# Altium PCB auto.PcbDoc
Units mil, origin at the board's own origin, x right, y up, seen from the top; angles counter-clockwise.
Board outline 5000 x 3000 mil, 2 copper layers (Top Layer, Bottom Layer); 35 components, 42 nets, 179 pads, 26 vias.
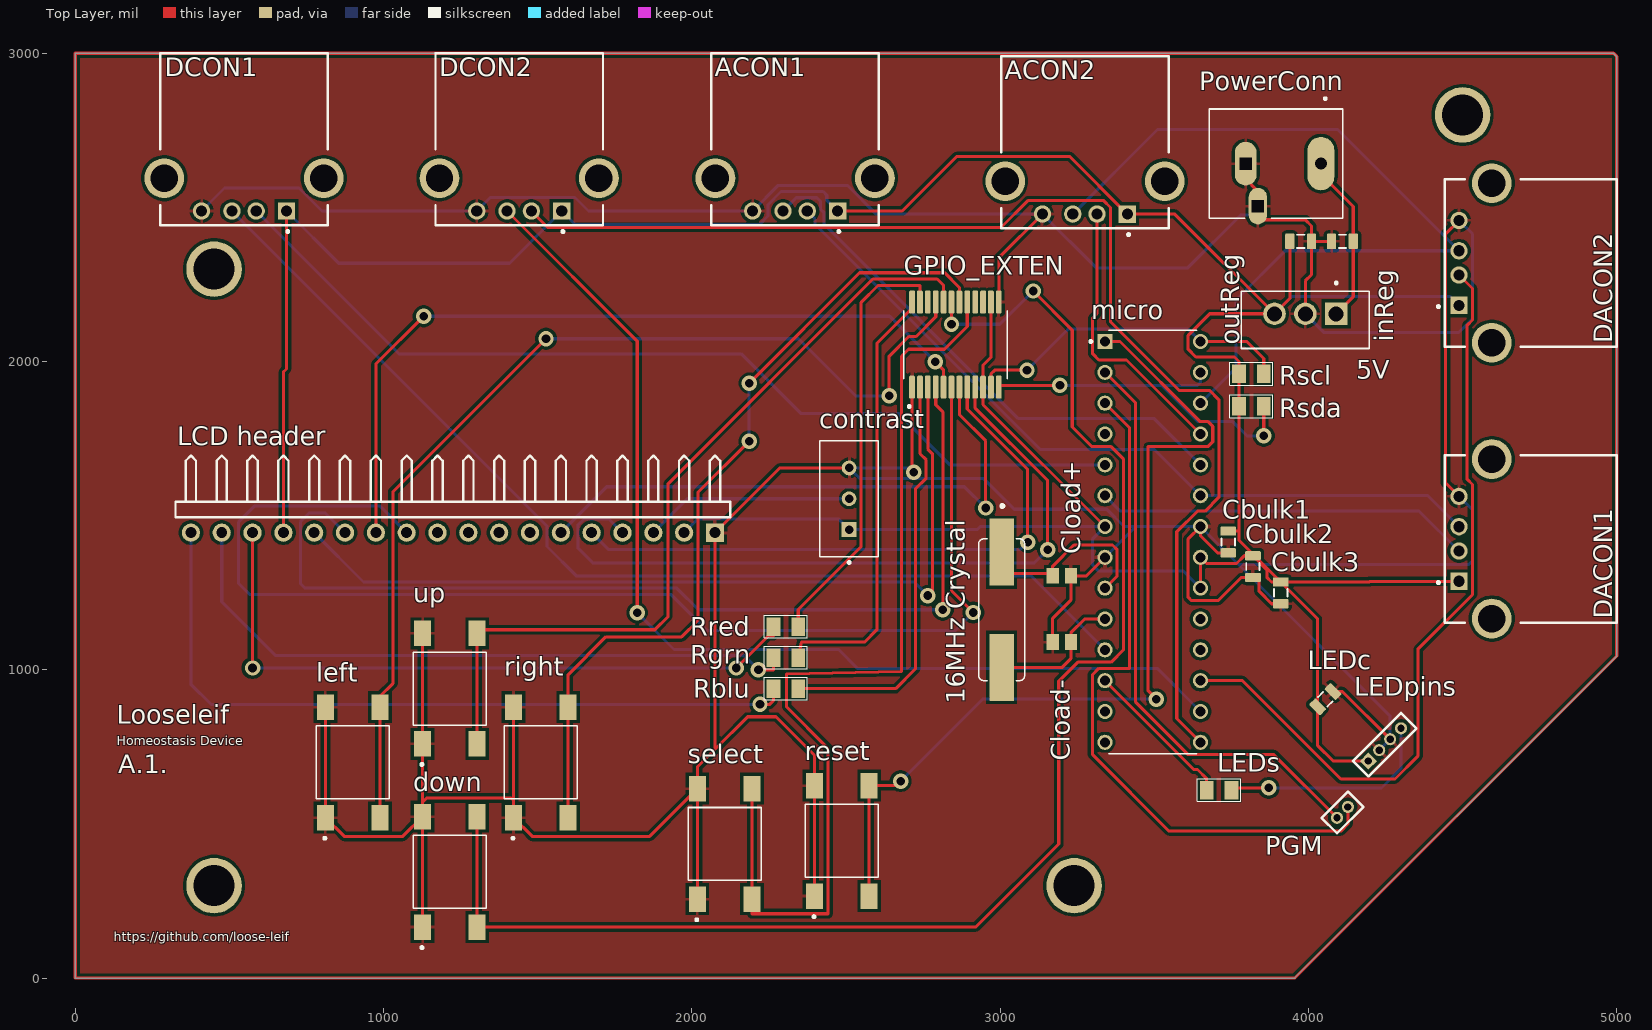
[diagram p0: Top Layer view]
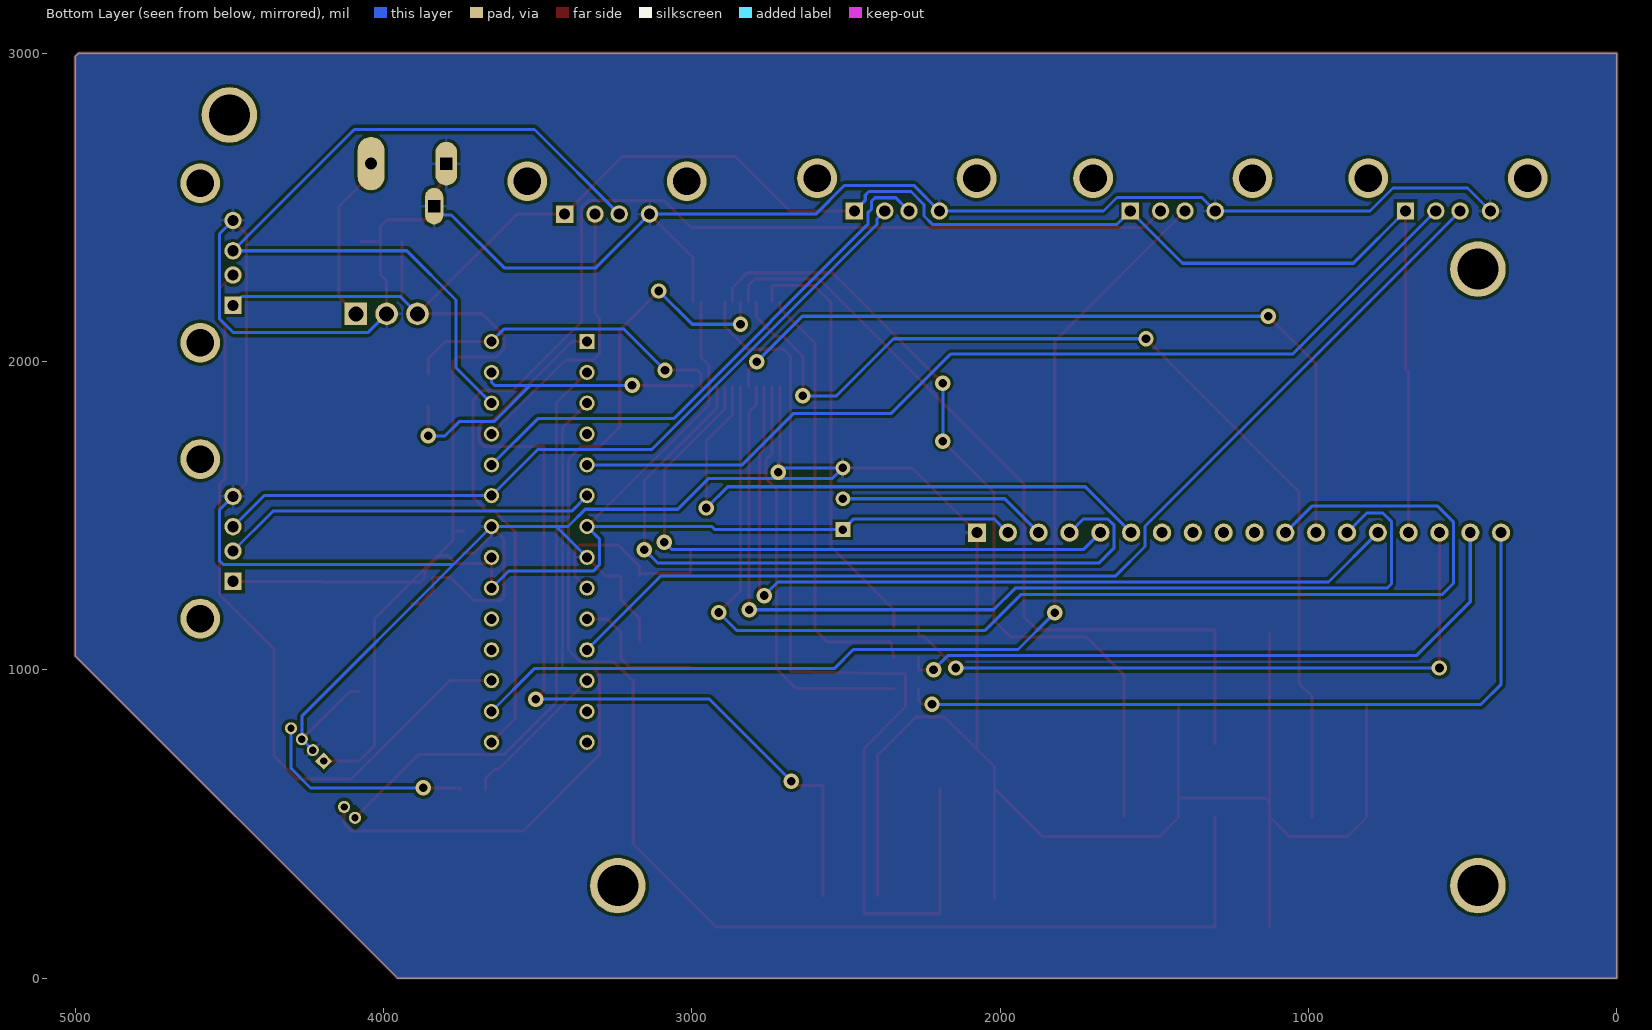
[diagram p1: Bottom Layer view, seen from below]
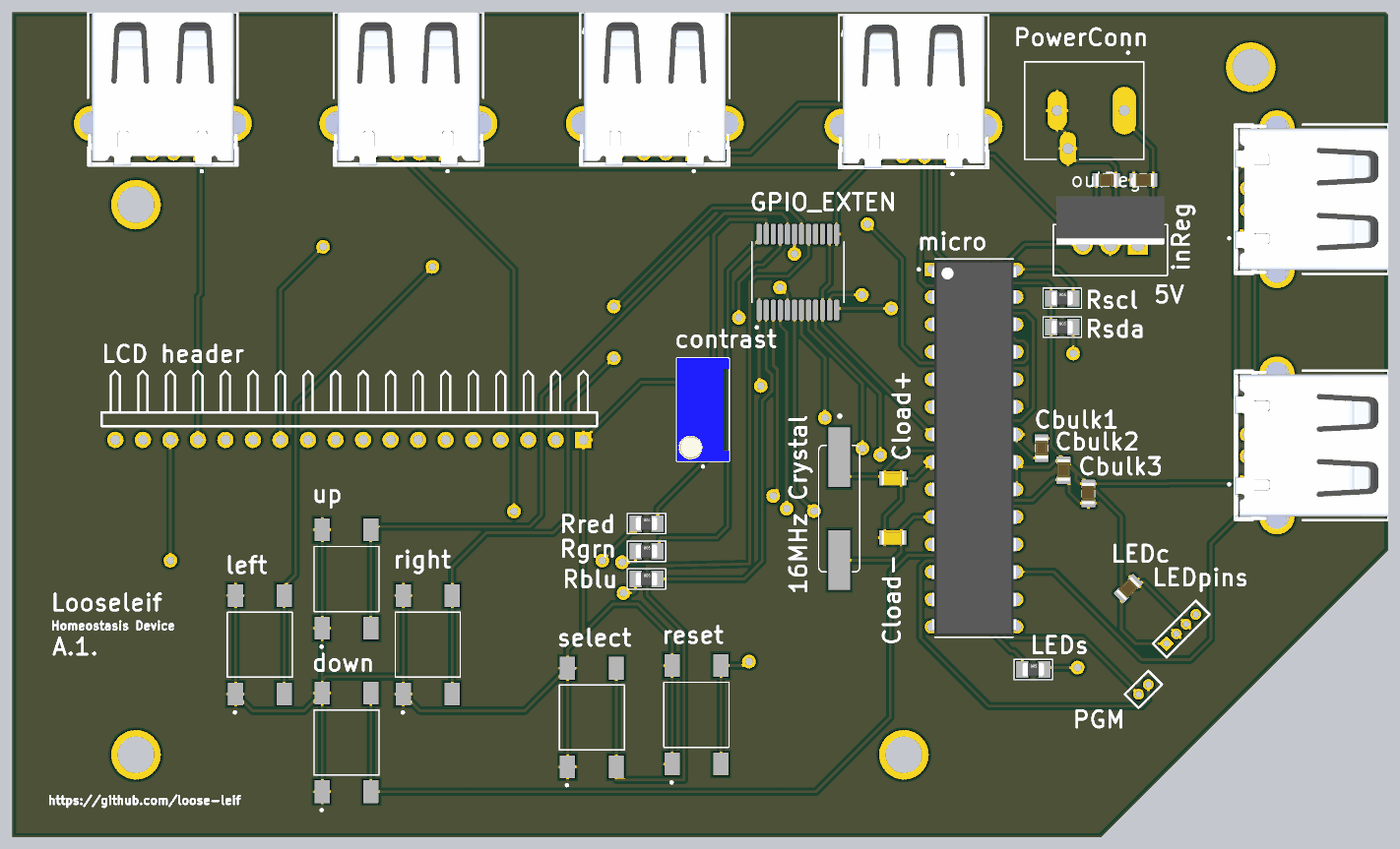
[diagram p2: 3D render of the assembled board from above, using the file's embedded part models]

## Layer stack, top to bottom
Top Solder: solder mask 0.4, Solder Resist, Dk 3.5
Top Layer: signal copper 1.4
Dielectric 1: dielectric 12.6, FR-4, Dk 4.8
Bottom Layer: signal copper 1.4
Bottom Solder: solder mask 0.4, Solder Resist, Dk 3.5

## Board outline
0,0 3955,0 5000,1045 5000,2990 4990,3000 0,3000

## Design rules (kind name [scope] priority, off if disabled: settings)
Clearance [All] p1: gap=10 ignorepadtopadclearanceinfootprint=FALSE except(0: Arc-Hole Track-Hole SMDPad-Hole THPad-Hole Via-Hole Fill-Hole Poly-Hole Region-Hole Text-Hole)
PolygonConnect [All] p1: connectstyle=Relief reliefconductorwidth=10 reliefentries=4 polygonreliefangle="90 Angle" airgapwidth=10
RoutingVias [All] p1: holewidth=28 width=50 viastyle="Through Hole" minholewidth=28 minwidth=50 maxholewidth=28 maxwidth=50
SolderMaskExpansion [All] p1: expansion=4 istentingtop=FALSE
Width [All] p1: maxlimit=10 minlimit=10 preferedwidth=10
30 further rules are at their usual default settings.

## Components (designator, comment, footprint, x,y, rotation, side; value= is the part's Value field where it differs from the comment)
5V "LM78M05CT" TO254P1054X470X1955-3 3990,2155 r180 top
"16MHz Crystal" "FC4SDCBMM16.0-T1" XTAL_FOXSDLF/160-20 3005,1195 r270 top
ACON1 "USB1130-15-A_REVA" GCT_USB1130-15-A_REVA 2335,2595 r180 top
ACON2 "USB1130-15-A_REVA" GCT_USB1130-15-A_REVA 3275,2585 r180 top
Cbulk1 "Capacitor 4.7µF +/-40% 25V 0805" CAPC0805(2012)145_L 3740,1415 r90 top value=100nF
Cbulk2 "Capacitor 4.7µF +/-40% 25V 0805" CAPC0805(2012)145_L 3820,1335 r90 top value=100nF
Cbulk3 "Capacitor 4.7µF +/-40% 25V 0805" CAPC0805(2012)145_L 3910,1250 r90 top value=100nF
Cload+ "Capacitor 1 uF +/- 10% 50 V 0805" CAPC2013X135X45ML10T25 3200,1305 r180 top value=20pF
Cload- "Capacitor 1 uF +/- 10% 50 V 0805" CAPC2013X135X45ML10T25 3200,1090 r0 top value=20pF
contrast "3296W-1-254LF" TRIM_3296W-1-254LF 2510,1555 r90 top
DACON1 "USB1130-15-A_REVA" GCT_USB1130-15-A_REVA 4595,1425 r90 top
DACON2 "USB1130-15-A_REVA" GCT_USB1130-15-A_REVA 4595,2320 r90 top
DCON1 "USB1130-15-A_REVA" GCT_USB1130-15-A_REVA 547.37,2595 r180 top
DCON2 "USB1130-15-A_REVA" GCT_USB1130-15-A_REVA 1440,2595 r180 top
down "4-1437565-2" SW_4-1437565-2 1215,345 r90 top
GPIO_EXTEN "MCP23018-E/SS" SOP65P780X200-24N 2855,2055 r90 top
inReg "Capacitor 4.7µF +/-40% 25V 0805" CAPC0805(2012)145_L 4110.04,2390 r180 top value=330nF
"LCD header" "Header 18H" HDR1X18H 2075,1445 r180 top
LEDc "Capacitor 4.7µF +/-40% 25V 0805" CAPC0805(2012)145_L 4055,905 r45 top value=100nF
LEDpins "MHDR1X4" MHDR1X4 4194.29,704.29 r45 top
LEDs "R_0805_4.7K_1%" 0805_Resistor 3710,610 r0 top value=220
left "4-1437565-2" SW_4-1437565-2 900,700 r90 top
micro "ATMEGA328-PU" DIP787W46P254L3467H508Q28 3495,1415 r0 top
outReg "Capacitor 4.7µF +/-40% 25V 0805" CAPC0805(2012)145_L 3975,2390 r0 top value=100nF
PGM "MHDR1X2" MHDR1X2 4092.64,520 r45 top
PowerConn "PJ-044BH" CUI_PJ-044BH 3895,2642.14 r270 top
Rblu "R_0805_200_1%" 0805_Resistor 2305,939.44 r0 top value=200
reset "4-1437565-2" SW_4-1437565-2 2486.42,445.47 r90 top
Rgrn "R_0805_200_1%" 0805_Resistor 2305,1040 r0 top value=200
right "4-1437565-2" SW_4-1437565-2 1510,700 r90 top
Rred "R_0805_200_1%" 0805_Resistor 2305,1140.56 r0 top value=200
Rscl "R_0805_4.7K_1%" 0805_Resistor 3815,1960 r0 top value=4.7K
Rsda "R_0805_4.7K_1%" 0805_Resistor 3815,1855 r0 top value=4.7K
select "4-1437565-2" SW_4-1437565-2 2106.42,435.47 r90 top
up "4-1437565-2" SW_4-1437565-2 1215,939.13 r90 top

## Footprints (in the part's own frame and the unit in brackets; to place one, negate y for a bottom-side part, rotate by r counter-clockwise, add the part's x,y. Pads: shape width x height; smd on the part's side, far side on the other; paste and mask are expansions set on the pad)
0805_Resistor [mil] "0805 Resistor"
  rect 45x60 smd: 1(-40,0) 2(40,0)
  silkscreen extent -70,-37 70,37, body extent -39,-25 39,25, height 31
CAPC0805(2012)145_L [mm] "Chip Capacitor, Body 2.0x1.2mm, Height 1.45mm, IPC High Density"
  rrect25% 0.76x1.3 smd: 1(-0.9,0) 2(0.89,0)
  silkscreen extent -0.3,-0.55 0.3,0.55, body extent -1,-0.6 1,0.6, height 1.45
CAPC2013X135X45ML10T25 [mm] "Chip Capacitor, 2-Leads, Body 2.10x1.35mm, IPC Low Density"
  rect 1x1.3 smd: 1(-0.75,0) 2(0.75,0)
  body extent -1.05,-0.67 1.05,0.67, height 1.35
CUI_PJ-044BH [mm]
  oval 4.4x2.2 hole 1: 1(0,3.7)
  oval 3.6x1.8 hole 1 square: 2(0,-2.5)
  oval 3.016x1.508 hole 1 square: 3(3.5,-1.5)
  silkscreen extent -5.45,-5.5 4.5,5.5
DIP787W46P254L3467H508Q28 [mm]
  rect 1.25x1.25 hole 0.83: 1(-3.937,16.51)
  round 1.25 hole 0.83: 2(-3.937,13.97) 3(-3.937,11.43) 4(-3.937,8.89) 5(-3.937,6.35) 6(-3.937,3.81) 7(-3.937,1.27) 8(-3.937,-1.27) 9(-3.937,-3.81) 10(-3.937,-6.35) 11(-3.937,-8.89) 12(-3.937,-11.43) 13(-3.937,-13.97) 14(-3.937,-16.51) 15(3.937,-16.51) 16(3.937,-13.97) 17(3.937,-11.43) 18(3.937,-8.89) 19(3.937,-6.35) 20(3.937,-3.81) 21(3.937,-1.27) 22(3.937,1.27) 23(3.937,3.81) 24(3.937,6.35) 25(3.937,8.89) 26(3.937,11.43) 27(3.937,13.97) 28(3.937,16.51)
  silkscreen extent -5.2,-17.45 3.62,17.45, body extent -3.95,-17.34 3.95,17.34, height 4.57
GCT_USB1130-15-A_REVA [mm]
  rect 1.428x1.428 hole 0.92: 1(-3.5,2.71)
  round 1.428 hole 0.92: 2(-1,2.71) 3(1,2.71) 4(3.5,2.71)
  round 3.276 hole 2.26: S1(-6.57,0) S2(6.57,0)
  silkscreen extent -6.9,-10.28 6.9,4.5, body extent -7.8,-10.28 7.8,3.88, height 6.99
HDR1X18H [mm] "Connector; Header; 18 Position; Right Angle"
  rect 1.5x1.5 hole 0.9: 1(0,0)
  round 1.5 hole 0.9: 2(2.54,0) 3(5.08,0) 4(7.62,0) 5(10.16,0) 6(12.7,0) 7(15.24,0) 8(17.78,0) 9(20.32,0) 10(22.86,0) 11(25.4,0) 12(27.94,0) 13(30.48,0) 14(33.02,0) 15(35.56,0) 16(38.1,0) 17(40.64,0) 18(43.18,0)
  silkscreen extent -1.27,-6.35 44.45,-1.27
MHDR1X2 [mm] "Connector; Header; 2 Position"
  round 1 hole 0.6: 1(0,0) 2(1.27,0)
  silkscreen extent -0.9,-0.9 2.17,0.9
MHDR1X4 [mm] "Connector; Header; 4 Position"
  rect 1x1 hole 0.6: 1(0,0)
  round 1 hole 0.6: 2(1.27,0) 3(2.54,0) 4(3.81,0)
  silkscreen extent -0.9,-0.9 4.71,0.9
SOP65P780X200-24N [mm]
  rrect50% 1.9x0.48 smd: 1(-3.505,3.575) 2(-3.505,2.925) 3(-3.505,2.275) 4(-3.505,1.625) 5(-3.505,0.975) 6(-3.505,0.325) 7(-3.505,-0.325) 8(-3.505,-0.975) 9(-3.505,-1.625) 10(-3.505,-2.275) 11(-3.505,-2.925) 12(-3.505,-3.575) 13(3.505,-3.575) 14(3.505,-2.925) 15(3.505,-2.275) 16(3.505,-1.625) 17(3.505,-0.975) 18(3.505,-0.325) 19(3.505,0.325) 20(3.505,0.975) 21(3.505,1.625) 22(3.505,2.275) 23(3.505,2.925) 24(3.505,3.575)
  silkscreen extent -5.2,-4.25 2.8,4.25
SW_4-1437565-2 [mm]
  rect 2.1x1.4 smd: 1(-4.55,2.25) 2(4.55,2.25) 3(-4.55,-2.25) 4(4.55,-2.25)
  silkscreen extent -6.35,-3 3,3
TO254P1054X470X1955-3 [mm]
  rect 1.86x1.86 hole 1.24: 1(-2.54,0)
  round 1.86 hole 1.24: 2(0,0) 3(2.54,0)
  silkscreen extent -5.27,-2.64 5.27,2.86, body extent -4.98,-4.45 4.98,0, height 15.75
TRIM_3296W-1-254LF [mm]
  rect 1.218x1.218 hole 0.71: 1(-2.54,0)
  round 1.218 hole 0.71: 2(0,0) 3(2.54,0)
  silkscreen extent -5.35,-2.41 4.76,2.42, body extent -4.76,-2.41 4.76,2.42, height 11.55
XTAL_FOXSDLF/160-20 [mm]
  rect 5.5x2 smd: 1(-4.75,0) 2(4.75,0)
  silkscreen extent -8.6,-1.9 5.85,1.9

## Part data
5V: "Linear Voltage Regulator IC 1 Output 500mA TO-220-3", Package="TO-220 ON Semiconductor", Availability=Warning, Check_prices=https://www.snapeda.com/parts/LM78M05CT/ON%20Semiconductor/view-part/2776523/?ref=eda, MF="ON Semiconductor", MP=LM78M05CT, Price=None, Purchase-URL=https://pricing.snapeda.com/search/part/LM78M05CT/?ref=eda, SnapEDA_Link=https://www.snapeda.com/parts/LM78M05CT/ON%20Semiconductor/view-part/2776523/?ref=snap
"16MHz Crystal": "16 MHz Â±30ppm Crystal 20pF 40 Ohms HC-49/US", Package="HC-49/US Fox Electronics", Availability="In Stock", Check_prices=https://www.snapeda.com/parts/FC4SDCBMM16.0-T1/Fox+Electronics/view-part/?ref=eda, MF="Fox Electronics", MP=FC4SDCBMM16.0-T1, Price=None, Purchase-URL=https://pricing.snapeda.com/search/part/FC4SDCBMM16.0-T1/?ref=eda, SnapEDA_Link=https://www.snapeda.com/parts/FC4SDCBMM16.0-T1/Fox+Electronics/view-part/?ref=snap
ACON1 ACON2 DACON1 DACON2 DCON1 DCON2 down left reset right select up: Package=None, Availability=Unavailable, Price=None
  ACON1 ACON2 DACON1 DACON2 DCON1 DCON2: MF="{'manufacturer': u'Global Connector Technology'}", MP=USB1130-15-A_REVA
  down left reset right select up: MF="{'manufacturer': u'TE Connectivity'}", MP=4-1437565-2
Cbulk1 Cbulk2 Cbulk3 inReg LEDc outReg: library part CMP-001-00080-5, "Chip Capacitor, 4.7µF +/-40%, 25V, 0805, Thickness 1.45 mm", Capacitor Type=Ceramic, Case/Package=0805, Max Operating Temperature=85°C, Min Operating Temperature=-55°C, Tolerance=20%, Voltage Rating=25V, Mounting Technology=SMT, Pins=2
Cload+ Cload-: library part CMP-001-00007-7, "Chip Capacitor, 1 uF, +/- 10%, 50 V, 0805 (2012 Metric)", Capacitor Type=Ceramic, Case/Package=0805, Max Operating Temperature=125°C, Min Operating Temperature=-55°C, Tolerance=10%, Voltage Rating=50V, Mounting Technology=SMT, Pins=2
contrast: "Res Cermet Trimmer 500K Ohm 10% 0.5W 25(Elec)Turn 2.19mm (9.53 X 4.83 X 11.55mm) Pin Thru-Hole Tube", Package=None, Availability=Unavailable, MF="{'manufacturer': u'Bourns'}", MP=3296W-1-254LF, Price=None
GPIO_EXTEN: "IC: expander; 16bit I/O port; I2C; SSOP24; 1.8Ã·5.5VDC", Package=None, Availability=Unavailable, MF="{'manufacturer': u'Microchip'}", MP=MCP23018-E/SS, Price=None
"LCD header": "Header, 18-Pin, Right Angle", LatestRevisionDate=17-Jul-2002, LatestRevisionNote="Re-released for DXP Platform.", Publisher="Altium Limited"
LEDpins: "Header, 4-Pin", LatestRevisionDate=17-Jul-2002, LatestRevisionNote="Re-released for DXP Platform.", Publisher="Altium Limited"
LEDs Rscl Rsda: library part CMP-058-000045-1, "RES 4.7K OHM 1/8W 1% 0805 SMD", Manufacturer=Yageo, Manufacturer Part Number=AC0805FR-074K7L, Package=0805_Resistor, Power Rating=0.125W, ComponentLink1Description=DigiKey, ComponentLink1URL=https://www.digikey.com/products/en?keywords=YAG3738TR-ND, Design Item ID=R_0805_4.7K_1%, DigiKey PN=YAG3738TR-ND, Source=resistor.SchLib, SVP Creator="Andrew Wu"
micro: "AVR AVRÂ® ATmega Microcontroller IC 8-Bit 20MHz 32KB (16K x 16) FLASH 28-PDIP", Package=None, Availability=Unavailable, MF="{'manufacturer': u'Microchip Technology'}", MP=ATMEGA328-PU, Price=None
PGM: "Header, 2-Pin", LatestRevisionDate=17-Jul-2002, LatestRevisionNote="Re-released for DXP Platform.", Publisher="Altium Limited"
PowerConn: "2.5 mm Center Pin, 5.0 A, Vertical, Through Hole, Dc Power Jack Connector", Package=None, Availability=Unavailable, MF="{'manufacturer': u'CUI Devices'}", MP=PJ-044BH, Price=None
Rblu Rgrn Rred: library part CMP-058-000027-1, "RES 200 OHM 1/8W 1% 0805 SMD", Manufacturer=Yageo, Manufacturer Part Number=RC0805FR-07200RL, Package=0805_Resistor, Power Rating=0.125W, ComponentLink1Description=DigiKey, ComponentLink1URL=https://www.digikey.com/products/en?keywords=311-200CRCT-ND, Design Item ID=R_0805_200_1%, DigiKey PN=311-200CRCT-ND, Source=resistor.SchLib, SVP Creator="Spencer Berglund"

## Free pads (board coordinates)
  round 180 hole 133 unplated: 2(450,300) 2(450,2300) 2(3240,300) 2(4500,2800)

## Via types
v1: diameter 50, hole 28, Top Layer to Bottom Layer, 26 vias

## Nets (pads, with @x,y where several pads share a name; then routed paths per layer and width w, separated by ;. In a path a pad name is that pad's centre, name@x,y a point inside that pad or via, vN(x,y) a via of type N, cw(c..) or ccw(c..) an arc to the next point about the centre after c; other vN are vias at no path point)
+5: 5V.3 "LCD header.2" "LCD header.15" ACON1.1 ACON2.1 Cbulk1.2 Cbulk2.2 Cbulk3.2 contrast.1 DACON1.1 DACON2.1 DCON1.1 DCON2.1 GPIO_EXTEN.10 GPIO_EXTEN.14 LEDc.1 LEDpins.1 micro.7 micro.20 micro.21 outReg.1 Rscl.1 Rsda.1 | length 11627.4
  Top Layer w10: 675,1445 675,1966 685.17,1976.17 DCON1.1 ; ACON1.1 2682.31,2488.31 2859,2665 3226.1,2665 ACON2.1 3566.69,2478.31 5V.3 ; GPIO_EXTEN.14 2970.16,2013.59 2944.57,1988 GPIO_EXTEN.10 2944.57,1860.43 micro.7 ; micro.20 micro.21 3670,1345 3766.96,1345 3792,1370.04 Cbulk2.2 3865,1325.04 3865,1300 3879.96,1285.04 Cbulk3.2 ; Cbulk1.2 3775,1450.04 ; outReg.1 3939.57,2204.57 5V.3 ; LEDpins.1 4080,704.29 4029.95,754.34 LEDc.1 4029.95,1165.09 Cbulk3.2 ; DACON1.1 4200.16,1287.2 4198,1285.04 Cbulk3.2 ; 3775,1450.04 Rsda.1 Rscl.1 3775,2000 3760,2015 3635,2015 3610,2040 3610,2085 3680,2155 5V.3 ; 3775,1450.04 3775,1420.04 Cbulk3.2
  Bottom Layer w10: DCON1.1 854.48,2319 1408.49,2319 DCON2.1 1621.1,2445 2220,2445 2247,2472 2247,2509 2289.42,2551.42 2426.06,2551.42 2437.48,2540 2437.48,2523.62 ACON1.1 ; 1975,1445 2020,1490 2475,1490 contrast.1 2925,1455 2935,1465 micro.7 3300,1425 3300,1340 3320,1320 3595,1320 micro.20 ; 5V.3 3946,2211 4459.51,2211 DACON2.1
+12: 5V.1 inReg.1 PowerConn.1 | length 553.5
  Top Layer w10: PowerConn.1 4040.67,2608 4145.47,2503.2 inReg.1 4145.47,2210.47 5V.1
ACON1-A1: ACON1.2 DACON1.3 micro.23 | length 2548.3
  Bottom Layer w10: ACON1.2 2399.66,2463.02 2399.66,2445.54 3130.2,1715 3500,1715 micro.23 4387.68,1565 DACON1.3
ACON1-A2: ACON1.3 micro.24 | length 1768.2
  Bottom Layer w10: ACON1.3 2338.74,2531.42 2406.06,2531.42 2417.48,2520 2417.48,2494.52 2429,2483 2429,2445.2 3059.2,1815 3500,1815 micro.24
ACON2-A1: ACON2.2 micro.25 | length 917
  Top Layer w10: ACON2.2 3314.37,2155.37 3300,2141 3300,2025 3320,2005 3410,2005 micro.25
ACON2-A2: ACON2.3 DACON2.3 micro.26 | length 2701.5
  Bottom Layer w10: ACON2.3 3510.32,2753 4094.68,2753 DACON2.3 3924.37,2359.37 3765,2200 3765,1980 micro.26
contWipe: "LCD header.3" contrast.2 | length 680.6
  Bottom Layer w10: 1875,1445 1985,1555 contrast.2
DACON1-D1: DACON1.2 micro.6 | length 1222.6
  Bottom Layer w10: micro.6 3390,1515 4358.94,1515 DACON1.2
DACON2-D1: DACON2.2 micro.17 | length 2533.9
  Top Layer w10: micro.17 3786,965 4105,646 4281,646 4355,720 4355,1067 4532,1244 4532,1601 4515,1618 4515,2118 4532,2135 4532,2236.94 DACON2.2
DCON1-D1: DCON1.2 micro.5 | length 3094.3
  Bottom Layer w10: DCON1.2 1050.05,2025 2160,2025 2353,1832 2670,1832 2837,1665 micro.5
DCON1-D2: DCON1.3 micro.11 | length 3460.4
  Bottom Layer w10: DCON1.3 1530,1466.31 1530,1400 1625,1305 3100,1305 micro.11
DCON2-D1: DCON2.2 micro.15 | length 3987.6
  Top Layer w10: DCON2.2 1532.68,2435 3003,2435 3090,2522 3336,2522 3358,2500 3358,2129 3581,1906 3680,1906 3709.61,1876.39 3709.61,1559.61 3665,1515 3640,1515 3573,1448 3573,842 micro.15
DCON2-D2: DCON2.3 micro.16 | length 3437.8
  Top Layer w10: DCON2.3 1823,2065.94 v1(1823,1185)
  Bottom Layer w10: v1(1823,1185) 1942,1066 2476,1066 2537,1005 3510,1005 micro.16
GND: 5V.2 "LCD header.1" ACON1.4 ACON2.4 Cbulk1.1 Cbulk2.1 Cbulk3.1 Cload+.1 Cload-.1 contrast.3 DACON1.4 DACON2.4 DCON1.4 DCON2.4 down.1 down.2 GPIO_EXTEN.1 GPIO_EXTEN.13 inReg.2 LEDc.2 LEDpins.2 LEDpins.3 left.1 left.2 micro.8 micro.22 outReg.2 PowerConn.2 PowerConn.3 reset.1 reset.2 right.1 right.2 select.1 select.2 up.1 up.2 | length 17591.4
  Top Layer w10: left.2 left.1 872.28,460 1062.28,460 down.2 ; down.1 down.2 ; up.2 up.1 1126.42,570.84 ; right.2 1421.42,576.58 ; select.1 select.2 ; reset.1 reset.2 2397.83,723.17 2273.12,847.88 2180.88,847.88 2075,742 ; contrast.3 2285,1655 2075,1445 2075,742 ; GPIO_EXTEN.1 2714.25,1646.75 v1(2720,1641) ; GPIO_EXTEN.13 2995.75,2336.85 ACON2.4 ; Cload-.1 3170.47,1167 3229.53,1226.06 Cload+.1 3280,1305 micro.8 ; Cbulk1.1 3705,1379.57 3650,1434.57 micro.22 3610,1425 3610,1235 3620,1225 3707.43,1225 3782,1299.57 Cbulk2.1 3840,1299.57 3840,1254.57 3880,1214.57 Cbulk3.1 ; PowerConn.2 3796.57,2592.37 3835.94,2553 PowerConn.3 3835.94,2460 3990.04,2460 4010.04,2440 outReg.2 ; 5V.2 3990,2262 4010.04,2282.04 outReg.2 ; inReg.2 outReg.2 ; LEDc.2 4110.22,929.78 LEDpins.3 ; DACON1.4 4445,1606.1 4445,2414.49 DACON2.4 ; down.2 1126.42,570.84 ; 1126.42,570.84 1140,584.42 1413.58,584.42 1421.42,576.58 ; 1421.42,576.58 right.1 1482.28,460 1863.23,460 select.2 ; select.2 2017.83,684.83 2075,742
  Bottom Layer w10: DCON1.4 484.27,2563 725.62,2563 800.31,2488.31 DCON2.4 1345.9,2532 1621,2532 1664.69,2488.31 ACON1.4 2280.32,2571.42 2504.83,2571.42 2597.94,2478.31 ACON2.4 3311.51,2304 3609,2304 3781,2476 3835.94,2476 PowerConn.3 ; v1(2720,1641) 2706,1655 contrast.3 2544,1621 2945.27,1621 3045.27,1521 3346,1521 3402,1465 3440,1465 ; micro.8 3440,1465 ; 5V.2 4051,2094 4487,2094 4532,2139 4532,2414.1 DACON2.4 ; LEDpins.2 4229.64,740.29 4264.36,775 LEDpins.3 4265,850 3773,1342 ; DACON1.4 4532,1519.1 4532,1354 4520,1342 3773,1342 ; 3440,1465 micro.22 3773,1342
GPA0: GPIO_EXTEN.17 select.3 select.4 | length 3212.8
  Top Layer w10: select.4 select.3 2195,209 2441,209 2441,746 2307,880 2307,986 2680,994 2680,2017 2703,2040 2819.41,2040 2893.39,2113.98 GPIO_EXTEN.17
GPA1: GPIO_EXTEN.18 right.3 right.4 | length 2693.5
  Top Layer w10: right.3 right.4 1598.58,984.58 1721,1107 1967,1107 2020,1160 2020,1576 v1(2186,1742) ; v1(2186,1930) 2544,2288 2819.8,2288 2867.8,2240 GPIO_EXTEN.18
  Bottom Layer w10: v1(2186,1742) v1(2186,1930)
GPA2: down.3 down.4 GPIO_EXTEN.19 | length 4839.3
  Top Layer w10: down.4 down.3 2920.87,165.87 3190,435 3190,963 3252,1025 3360,1025 3399.61,1064.61 3399.61,1684.39 3360,1724 3298,1724 3234,1788 3234,2102 v1(3107,2229) ; v1(2842.2,2121) GPIO_EXTEN.19
  Bottom Layer w10: v1(2842.2,2121) 2999,2121 v1(3107,2229)
GPA3: GPIO_EXTEN.20 up.3 up.4 | length 2669.5
  Top Layer w10: up.3 up.4 1303.58,1130 1880,1130 1923,1173 1923,1603.79 2587.21,2268 2795.61,2268 2816.61,2247 GPIO_EXTEN.20
GPA4: GPIO_EXTEN.21 left.3 left.4 | length 3346.2
  Top Layer w10: left.3 left.4 988.58,914 1030,955.42 1030,1577 v1(1527,2074) ; v1(2640,1889) 2640,2017.65 2703.7,2081.35 2727.35,2081.35 2791.02,2145.02 GPIO_EXTEN.21
  Bottom Layer w10: v1(1527,2074) 2346,2074 2531,1889 v1(2640,1889)
GPA5: GPIO_EXTEN.22
GPA6: GPIO_EXTEN.23 Rred.2 | length 1403.6
  Top Layer w10: Rred.2 2345,1196 2549,1400 2549,2192 2604,2247 2739.84,2247 GPIO_EXTEN.23
GPA7: GPIO_EXTEN.24 Rgrn.2 | length 1422.9
  Top Layer w10: Rgrn.2 2355,1090 2560,1090 2600,1130 2600,2058.83 2714.25,2173.08 GPIO_EXTEN.24
GPB0: GPIO_EXTEN.2 Rblu.2 | length 1343.8
  Top Layer w10: Rblu.2 2345,939 2661,939 2725,1003 2725,1586.41 2760,1621.41 2760,1681.25 2739.84,1701.41 GPIO_EXTEN.2
GPB1: "LCD header.14" GPIO_EXTEN.3 | length 2762.8
  Top Layer w10: v1(2765,1241) 2780,1256 2780,1701.25 2765.43,1715.82 GPIO_EXTEN.3
  Bottom Layer w10: 775,1445 935,1285 2721,1285 v1(2765,1241)
GPB2: "LCD header.13" GPIO_EXTEN.4 | length 3234.3
  Top Layer w10: GPIO_EXTEN.4 2791.02,1860 2814,1837.02 v1(2814,1195)
  Bottom Layer w10: 875,1445 811,1509 759,1509 730,1480 730,1280 745,1265 1951.28,1265 2021.28,1195 v1(2814,1195)
GPB3: "LCD header.12" GPIO_EXTEN.5 | length 2580.3
  Top Layer w10: 975,1445 975,1992 v1(1130,2147) ; v1(2789.61,1999) 2816.61,1972 GPIO_EXTEN.5
  Bottom Layer w10: v1(1130,2147) 2641.61,2147 v1(2789.61,1999)
GPB4: "LCD header.11" GPIO_EXTEN.6 | length 4032.1
  Top Layer w10: GPIO_EXTEN.6 2842.2,1256.8 v1(2913,1186)
  Bottom Layer w10: 1075,1445 989,1531 581,1531 530,1480 530,1280 565,1245 1931.76,1245 2048.76,1128 2855,1128 v1(2913,1186)
GPB5: "LCD header.6" GPIO_EXTEN.7 | length 1895.6
  Top Layer w10: GPIO_EXTEN.7 2867.8,1828.2 2953,1743 v1(2953,1525)
  Bottom Layer w10: 1575,1445 1724,1594 2884,1594 v1(2953,1525)
GPB6: "LCD header.5" GPIO_EXTEN.8 | length 2029.9
  Top Layer w10: GPIO_EXTEN.8 2893.39,1846.33 3089,1650.71 v1(3089,1414)
  Bottom Layer w10: 1675,1445 1729,1391 3066,1391 v1(3089,1414)
GPB7: "LCD header.4" GPIO_EXTEN.9 | length 2432.2
  Top Layer w10: GPIO_EXTEN.9 2918.98,1849.02 3154,1614 v1(3154,1390)
  Bottom Layer w10: 1775,1445 1730.47,1489.53 1650.53,1489.53 1630,1469 1630,1396 1680,1346 3110,1346 v1(3154,1390)
LEDSIG: LEDs.1 micro.12 | length 498.7
  Top Layer w10: micro.12 3628,677 3640,677 3670,647 LEDs.1
"NetLCD header_16": "LCD header.16" Rred.1 | length 2202.6
  Top Layer w10: v1(575,1006) 575,1445 ; v1(2144,1006) 2248,1110 2265,1110 Rred.1
  Bottom Layer w10: v1(575,1006) v1(2144,1006)
"NetLCD header_17": "LCD header.17" Rgrn.1 | length 2145.5
  Top Layer w10: v1(2216,1000) 2265,1000 Rgrn.1
  Bottom Layer w10: 475,1445 475,1221 650,1046 2170,1046 v1(2216,1000)
"NetLCD header_18": "LCD header.18" Rblu.1 | length 2453.3
  Top Layer w10: v1(2221,888) 2253,888 2265,900 Rblu.1
  Bottom Layer w10: 375,1445 375,953 440,888 v1(2221,888)
NetLEDpins_4: LEDpins.4 LEDs.2 | length 713.6
  Top Layer w10: LEDs.2 3750,617 v1(3871,617)
  Bottom Layer w10: v1(3871,617) 4237,617 4300.36,680.36 LEDpins.4
OSC+: "16MHz Crystal.1" Cload+.2 micro.9 | length 652.1
  Top Layer w10: 3005,1382.01 3005,1312 Cload+.2@3170.47,1312 ; Cload+.2 Cload+.2@3170.47,1312 ; micro.9 3379.61,1304.61 3379.61,1390 3364.61,1405 3239,1405 3170.47,1336.47 Cload+.2@3170.47,1312
OSC-: "16MHz Crystal.2" Cload-.2 micro.10 | length 450.3
  Top Layer w10: 3005,1007.99 3005,1007 3200,1007 3229.53,1036.53 Cload-.2 3229.53,1120 3274.53,1165 micro.10
RESET: micro.1 reset.3 reset.4 | length 2966
  Top Layer w10: reset.3 reset.4 2662.61,624.61 v1(2677,639) ; micro.1 3389,2065 3649,1805 3674.61,1805 3689.61,1790 3689.61,1740 3675,1725.39 3480,1724.39 3480,931.88 v1(3506.88,905)
  Bottom Layer w10: v1(2677,639) 2943,905 v1(3506.88,905)
RX: micro.2 PGM.1 | length 1919.4
  Top Layer w10: micro.2 3439.61,1865.39 3439.61,895.39 3610,725 3887.65,725 PGM.1
SCL: GPIO_EXTEN.11 micro.28 Rscl.2 | length 1077.2
  Top Layer w10: GPIO_EXTEN.11 2970.16,1960 2982.16,1972 v1(3087,1972) ; micro.28 3800,2065 3855,2010 Rscl.2
  Bottom Layer w10: v1(3087,1972) 3220,2105 3610,2105 micro.28
SDA: GPIO_EXTEN.12 micro.27 Rsda.2 | length 1191.3
  Top Layer w10: GPIO_EXTEN.12 2995.75,1923 v1(3194,1923) ; v1(3855,1759) Rsda.2
  Bottom Layer w10: v1(3194,1923) 3524,1923 ; micro.27 3650,1933 3640,1923 3524,1923 ; v1(3855,1759) 3801,1759 3755,1805 3642,1805 3524,1923
TX: micro.3 PGM.2 | length 2276.1
  Top Layer w10: micro.3 3419.61,1785.39 3419.61,1005.61 3419,1005 3320,1005 3300,985 3300,725 3548,477 4105,477 4128,500 PGM.2
pads on no net: "LCD header.7" "LCD header.8" "LCD header.9" "LCD header.10" ACON1.S1 ACON1.S2 ACON2.S1 ACON2.S2 DACON1.S1 DACON1.S2 DACON2.S1 DACON2.S2 DCON1.S1 DCON1.S2 DCON2.S1 DCON2.S2 GPIO_EXTEN.15 GPIO_EXTEN.16 micro.4 micro.13 micro.14 micro.18 micro.19
copper on no net: | length 15382
  Top Layer w10: 0,0 3955,0 5000,1045 5000,2990 4990,3000 4180,3000 0,3000 0,0

## Polygon pours and split planes (outlines as drawn)
GND on Bottom Layer "GND_L02_P001" (solid, pour order 1): 0,0 3955,0 5000,1045 5000,2990 4990,3000 0,3000
GND on Top Layer "GND_L01_P000" (solid, pour order 0): 0,3000 0,0 3955,0 5000,1045 5000,2990 4990,3000

## Silkscreen, mask and mechanical layers (free items; w line width, h text height)
Top Overlay:
  text "Looseleif" at 135,825 h60
  text "Homeostasis Device" at 135,755 h30
  text "A.1." at 140,665 h60
  text "https://github.com/loose-leif" at 125,120 h30

## Text inside footprints (layer, text, board x,y; h text height)
ACON1: Mechanical 13 "PCB EDGE" at 2041.69,2988.7 h32 r180
ACON2: Mechanical 13 "PCB EDGE" at 2981.69,2978.7 h32 r180
DACON1: Mechanical 13 "PCB EDGE" at 4988.7,1718.31 h32 r90
DACON2: Mechanical 13 "PCB EDGE" at 4988.7,2613.31 h32 r90
DCON1: Mechanical 13 "PCB EDGE" at 254.07,2988.7 h32 r180
DCON2: Mechanical 13 "PCB EDGE" at 1146.69,2988.7 h32 r180